# EAGLE board rocketnet-test (EAGLE 6.4)
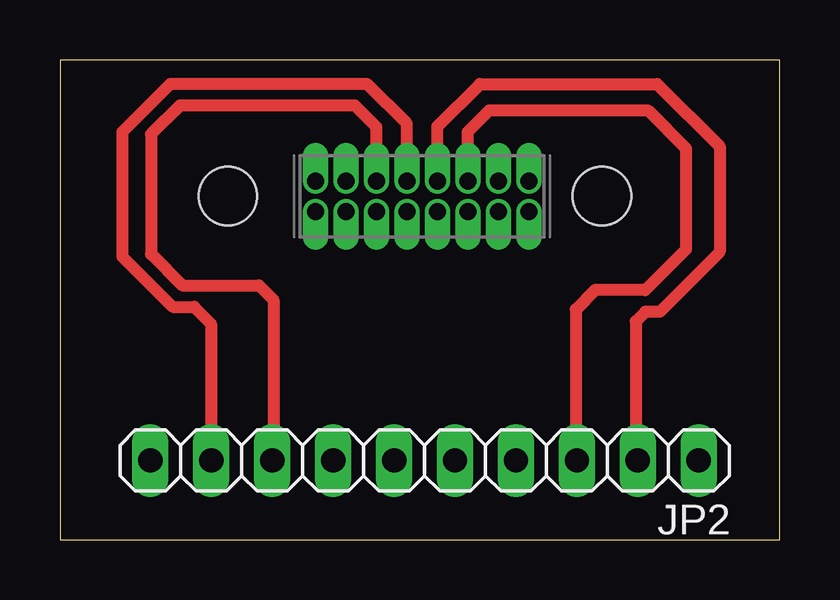
[diagram p0: board, top side]
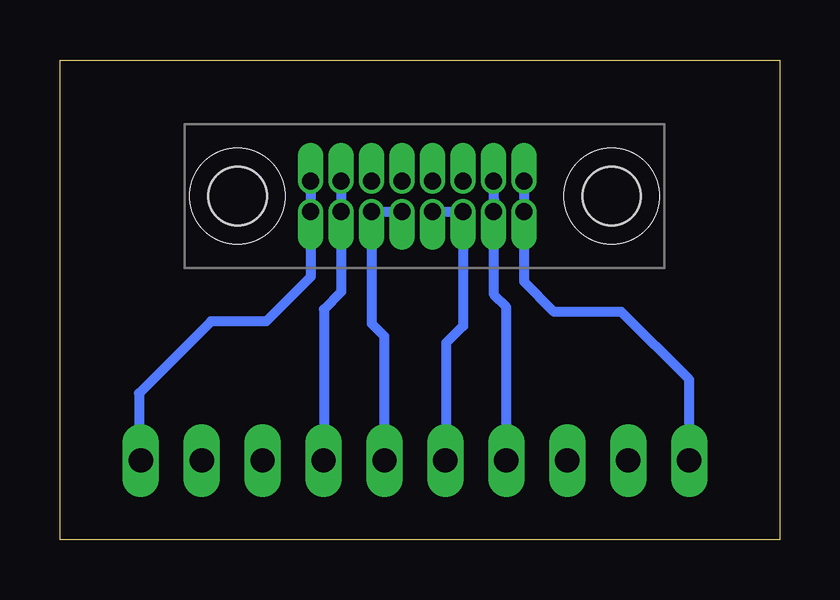
[diagram p1: board, bottom side, seen from below]

Size 30 x 20 mm. Coordinates in mm from the lower left corner, seen from the top.
Outline: 0,0 30,0 30,20 0,20 0,0
Copper layers (1+2*3+16): Top 0.0432mm / dielectric 12mil / Route2 0.0356mm / dielectric 28mil / Route3 0.0356mm / dielectric 12mil / Bottom 0.0432mm
Design rules "sunstone_4lr_rules_v1.3_modifid *": minimum track width 6mil, minimum drill 8mil, track to track 6mil, track to pad 6mil, pad to pad 6mil, via to via 6mil, smd to smd 6mil, copper to edge 20mil, drill to drill 16mil, minimum pad ring 0.1mm, minimum via ring 0.2118mm, stop-mask expansion 3mil, vias tented up to drill 0mil, thermal gap 10mil

## Footprints (pad centres in the part's own frame; a part is rotated, then mirrored left to right if it is on the bottom)
ROCKETNET-M-16 = drill 0.71 pad 0.95 offset: A1 -1.905,0.635; A2 -0.635,0.635; A3 0.635,0.635; A4 1.905,0.635; B+@15 4.445,-0.635; B+@16 4.445,0.635; B-@1 -4.445,-0.635; B-@2 -4.445,0.635; R+@5 -1.905,-0.635; R+@7 -0.635,-0.635; R-@3 -3.175,-0.635; R-@4 -3.175,0.635; T+@13 3.175,-0.635; T+@14 3.175,0.635; T-@9 0.635,-0.635; T-@11 1.905,-0.635 | hole 2.438: 7.5,0; -8.1,0
1X10 = drill 1.016 long: 1 -11.43,0; 2 -8.89,0; 3 -6.35,0; 4 -3.81,0; 5 -1.27,0; 6 1.27,0; 7 3.81,0; 8 6.35,0; 9 8.89,0; 10 11.43,0

## Placement (x,y rotation side)
J1  ROCKETNET-CONNECTOR-16M  [ROCKETNET-M-16]  15.1,14.32 0 top
JP2  [1X10]  15.2,3.3 180 top

## Library data of the parts
J1 = rocketnet-connector
JP2 = pinhead

## Nets
N$2: J1.R+@5 J1.R+@7 JP2.6
N$3: J1.R-@3 J1.R-@4 JP2.7
N$4: J1.T-@9 J1.T-@11 JP2.5
N$5: J1.B+@15 J1.B+@16 JP2.1
N$6: J1.B-@1 J1.B-@2 JP2.10
N$7: J1.A2 JP2.9
N$8: J1.A1 JP2.8
N$9: J1.A3 JP2.2
N$10: J1.A4 JP2.3
N$11: J1.T+@13 J1.T+@14 JP2.4

## Tracks (layer width: path | path; a pad name or v marks a point on that pad's centre or on a via)
N$2
  Bottom 0.406: J1.R+@7 J1.R+@5 13.2,8.9 13.9,8.2 13.9,3.33 JP2.6
N$3
  Bottom 0.406: J1.R-@4 11.93,14.2 | 11.93,14.2 J1.R-@3 | JP2.7 11.39,9.69 11.9,10.2 11.9,14.18 11.93,14.2
N$4
  Bottom 0.406: JP2.5 16.47,8.47 17,9 J1.T-@11 J1.T-@9
N$5
  Bottom 0.406: J1.B+@16 J1.B+@15 19.55,10.96 21.4,9.1 23.7,9.1 26.7,6.1 26.7,3.37 JP2.1
N$6
  Bottom 0.406: JP2.10 3.77,6.67 6.6,9.5 9.4,9.5 10.65,10.76 J1.B-@1 J1.B-@2
N$7
  Top 0.5: J1.A2 14.46,17.34 12.8,19 4.6,19 2.6,17 2.6,11.8 4.7,9.7 5.6,9.7 6.3,9 JP2.9
N$8
  Top 0.5: J1.A1 13.2,17.2 12.3,18.1 5,18.1 3.8,16.9 3.8,11.9 5.1,10.6 8.3,10.6 8.9,10 8.9,3.35 JP2.8
N$9
  Top 0.5: J1.A3 15.73,17.23 17.5,19 24.9,19 27.5,16.4 27.5,12 25,9.5 24.4,9.5 24,9.1 24,3.39 JP2.2
N$10
  Top 0.5: J1.A4 17,17 17.9,17.9 24.5,17.9 26.1,16.3 26.1,12.1 24.4,10.4 22.3,10.4 21.5,9.6 21.5,3.35 JP2.3
N$11
  Bottom 0.406: J1.T+@14 J1.T+@13 18.27,10.32 19,9.6 JP2.4